# EAGLE board con_brd (EAGLE 9.6.2)
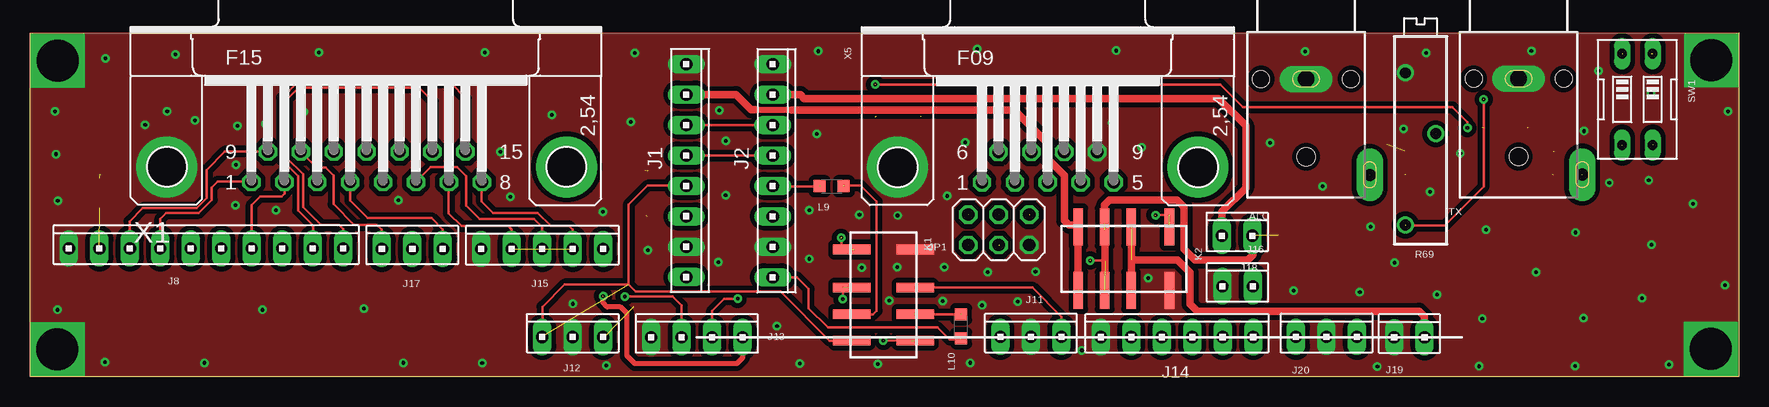
[diagram p0: board, top side]
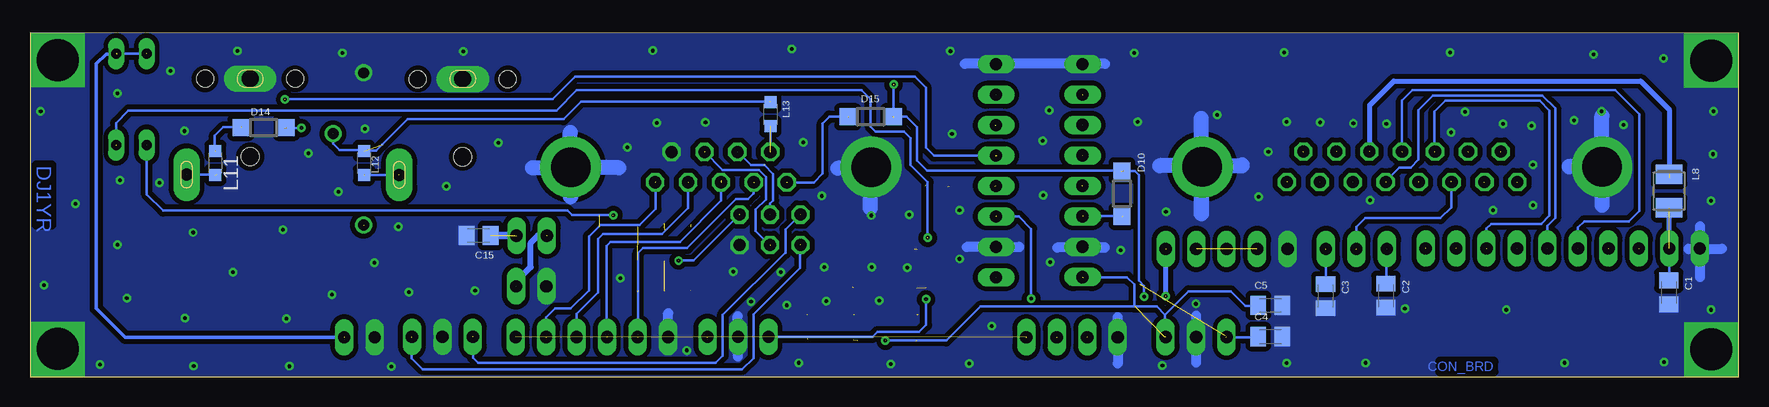
[diagram p1: board, bottom side, seen from below]

Size 142.44 x 28.73 mm. Coordinates in mm from the lower left corner, seen from the top.
Outline: 0,0 0,28.67 142.44,28.73 142.43,0.04 0,0
Copper layers (1*16): Top 0.035mm / dielectric 1.5mm / Bottom 0.035mm
Design rules "default *": minimum track width 6mil, minimum drill 0.35mm, track to track 6mil, track to pad 6mil, pad to pad 6mil, via to via 6mil, smd to smd 6mil, copper to edge 0mil, drill to drill 6mil, minimum pad ring 10mil, minimum via ring 8mil, stop-mask expansion 4mil, vias tented up to drill 0mil, thermal gap 10mil

## Footprints (pad centres in the part's own frame; a part is rotated, then mirrored left to right if it is on the bottom)
WBTOR1 = drill 1.4 pad 2.2 long: S 0,-4 | drill 1 pad 2.2 long: T 5.3,-12 | hole 1.4: -3.75,-4; 3.75,-4 | hole 1.5: 0,-10.5
C0805K = smd 1.3 x 1.6: 1 -1,0; 2 1,0
SOD123 = smd 1.4 x 1.4: A 1.9,0; C -1.9,0
10X08MTA = drill 1.016 long: 1 8.89,0; 2 6.35,0; 3 3.81,0; 4 1.27,0; 5 -1.27,0; 6 -3.81,0; 7 -6.35,0; 8 -8.89,0
10X10MTA = drill 1.016 long: 1 11.43,0; 2 8.89,0; 3 6.35,0; 4 3.81,0; 5 1.27,0; 6 -1.27,0; 7 -3.81,0; 8 -6.35,0; 9 -8.89,0; 10 -11.43,0
10X03MTA = drill 1.016 long: 1 2.54,0; 2 0,0; 3 -2.54,0
10X04MTA = drill 1.016 long: 1 3.81,0; 2 1.27,0; 3 -1.27,0; 4 -3.81,0
10X06MTA = drill 1.016 long: 1 6.35,0; 2 3.81,0; 3 1.27,0; 4 -1.27,0; 5 -3.81,0; 6 -6.35,0
10X05MTA = drill 1.016 long: 1 5.08,0; 2 2.54,0; 3 0,0; 4 -2.54,0; 5 -5.08,0
10X02MTA = drill 1.016 long: 1 1.27,0; 2 -1.27,0
2X03 = drill 1.016 octagon: 1 -2.54,-1.27; 2 -2.54,1.27; 3 0,-1.27; 4 0,1.27; 5 2.54,-1.27; 6 2.54,1.27
GN-A = smd 0.8 x 3.1: 1 -3.835,-2.65; 2 -0.635,-2.65; 3 1.565,-2.65; 4 3.765,-2.65; 5 3.765,2.65; 6 1.565,2.65; 7 -0.635,2.65; 8 -3.835,2.65
L3230M = smd 1.6 x 2.2: 1 -1.4,0; 2 1.4,0
L2012C = smd 1 x 1: 1 -1,0; 2 1,0
RTRIM43P = drill 0.9: 1 -7.62,1.27; 2 0,-1.27; 3 5.08,1.27
EDG-02 = drill 0.813 long: 1 -1.27,-3.81; 2 1.27,-3.81; 3 1.27,3.81; 4 -1.27,3.81
F15HP = drill 1.016 octagon: 1 -9.601,-1.27; 2 -6.858,-1.27; 3 -4.115,-1.27; 4 -1.372,-1.27; 5 1.372,-1.27; 6 4.115,-1.27; 7 6.858,-1.27; 8 9.601,-1.27; 9 -8.23,1.27; 10 -5.486,1.27; 11 -2.743,1.27; 12 0,1.27; 13 2.743,1.27; 14 5.486,1.27; 15 8.23,1.27 | drill 3.302 pad 5.08: G1 -16.662,0; G2 16.662,0
F09HP = drill 1.016 octagon: 1 -5.486,-1.27; 2 -2.743,-1.27; 3 0,-1.27; 4 2.743,-1.27; 5 5.486,-1.27; 6 -4.115,1.27; 7 -1.372,1.27; 8 1.372,1.27; 9 4.115,1.27 | drill 3.302 pad 5.08: G1 -12.522,0; G2 12.522,0

## Placement (x,y rotation side)
ALC  WBTOR1  [WBTOR1]  106.37,28.87 0 top
C1  [C0805K]  5.83,7.06 270 bottom
C2  [C0805K]  29.41,6.79 270 bottom
C3  [C0805K]  34.44,6.75 270 bottom
C4  [C0805K]  39.05,3.36 0 bottom
C5  [C0805K]  39.06,5.98 0 bottom
C15  [C0805K]  105.04,11.81 180 bottom
D10  [SOD123]  51.43,15.3 90 bottom
D14  [SOD123]  122.96,20.81 0 bottom
D15  [SOD123]  72.37,21.72 0 bottom
J1  [10X08MTA]  54.7,17.22 270 top
J2  [10X08MTA]  61.91,17.2 270 top
J8  [10X10MTA]  14.68,10.72 0 top
J11  [10X03MTA]  83.43,3.34 0 top
J12  [10X03MTA]  45.24,3.33 0 top
J13  [10X04MTA]  55.59,3.32 0 top
J14  [10X06MTA]  95.61,3.33 0 top
J15  [10X05MTA]  42.69,10.68 0 top
J16  [10X02MTA]  100.66,7.57 0 top
J17  [10X03MTA]  31.87,10.69 0 top
J18  [10X02MTA]  100.63,11.78 0 top
J19  [10X02MTA]  114.98,3.3 0 top
J20  [10X03MTA]  108.07,3.34 0 top
JP1  [2X03]  80.76,12.28 180 top
K1  GN200A1H  [GN-A]  71.14,6.81 270 top
K2  GN200A1H  [GN-A]  91.15,9.86 180 top
L8  [L3230M]  5.8,15.52 270 bottom
L9  [L2012C]  66.82,15.92 0 top
L10  [L2012C]  77.61,4.24 90 top
L11  [L2012C]  126.99,17.87 270 bottom
L12  [L2012C]  114.6,17.85 270 bottom
L13  [L2012C]  80.72,21.92 270 bottom
R69  [RTRIM43P]  115.91,20.3 90 top
SW1  [EDG-02]  133.99,23.16 180 top
TX  WBTOR1  [WBTOR1]  124.09,28.89 0 top
X1  [F15HP]  28.06,17.53 0 top
X5  [F09HP]  84.84,17.51 0 top

## Library data of the parts
ALC TX = con-lumberg; MPN: WBTOR 1 BLACK; OC_FARNELL: 1200146; OC_NEWARK: 98K2588
C1-C5 C15 = rcl; SPICEPREFIX: C
D10 D14 D15 = diode
J1 J2 J8 J11-J20 = con-amp
JP1 = pinhead
K1 K2 = relay; OC_FARNELL: unknown; OC_NEWARK: unknown
L8-L13 = rcl; SPICEPREFIX: L
R69 = rcl; SPICEMODEL: X; SPICEPREFIXL: POT
SW1 = special
X1 X5 = con-subd; OC_FARNELL: unknown; OC_NEWARK: unknown

## Nets
8V: J1.1 J12.1 K1.5
8V_BND_REF: K1.6 L10.2
12V: J13.1 J14.1 J15.1
12V_EXT: J19.1 K2.2 K2.7 SW1.1 SW1.2
A: J14.5 X5.2
ACC: J1.7 K2.4 K2.5
ACC_OUT: J2.7 J16.1 J18.2
ALC: J1.5 J2.5 R69.1
B: J14.4 X5.3
BAND: J1.4 J12.3 K1.4
BAND_MCU: J11.3 K1.2
BAND_MCU_OUT: K1.3 L9.2
BAND_REF_MCU: J11.1 K1.7
C: J14.3 X5.4
D: J14.2 X5.5
EXT_ALC: L12.1 L13.1 R69.2
GND: ALC.S C1.2 C2.2 C3.2 C4.2 C5.2 C15.2 J1.2 J1.8 J2.2 J2.8 J8.10 J11.2 J12.2 J13.4 J14.6 J15.5 J16.2 J19.2 J20.2 JP1.2 K1.8 K2.8 R69.3 TX.S X1.G1 X5.9 X5.G1
N$71: J1.6 J2.6
N$72: J2.4 L9.1
N$75: J2.1 L10.1
N$76: L11.2 TX.T
N$77: ALC.T L12.2
N$79: D10.C J1.3
N$81: D14.C L11.1
N$82: D15.C X5.1
N$84: L13.2 X5.6
N$95: J20.3 JP1.5
N$96: J8.9 L8.2
N$101: K2.1 SW1.3
N$106: K1.1 SW1.4
N$111: J20.1 JP1.6
REM_13,8V: L8.1 X1.13
REM_B: J15.2 X1.6
REM_C: J15.3 X1.7
REM_D: J15.4 X1.8
REM_LIN: J8.1 X1.14
REM_M1: J17.1 X1.4
REM_M2: J17.3 X1.10
REM_ME: J17.2 X1.3
REM_MS1: J8.5 X1.5
REM_MS2: J8.4 X1.2
REM_PROL: J8.7 X1.1
REM_REMO: J8.3 X1.11
REM_RXD: JP1.4 X5.8
REM_TUN: J8.2 X1.15
REM_TXD: JP1.3 X5.7
REM_TXL: J8.8 X1.9
REM_WAIT: J8.6 X1.12
SEND: D10.A D14.A D15.A J13.3
TX_OUT: J2.3 J13.2
VCC: C15.1 J18.1 JP1.1 K2.3 K2.6

## Tracks (layer width: path | path; a pad name or v marks a point on that pad's centre or on a via)
8V  (via drill 0.3)  (5 unrouted)
  Top 0.203: v71.14,3.04 73.47,3.04
  Bottom 0.203: 54.64,8.31 50.99,8.31 50.4,7.72 50.4,5.88 48.52,5.88 47.84,5.2 47.84,3.32 | 50.36,5.89 63.21,5.89 66.06,3.04 v71.14,3.04
8V_BND_REF  (2 unrouted)
  Top 0.203: 73.72,5.22 77.65,5.22
12V  (via drill 0.3)  (5 unrouted)
  Top 0.406: 59.4,3.3 59.4,1.61 58.91,1.12 50.43,1.12 49.76,1.79 49.76,5.31 49.23,5.85 48.12,5.85 47.76,6.21 47.76,6.75
  Bottom 0.406: 47.77,6.73 47.77,10.6 47.8,10.62
  other vias: 47.77,6.76
12V_EXT  (8 unrouted)
  Top 0.61: 91.8,7.1 91.8,12.24 91.79,12.25 | 91.83,9.77 95.64,9.77 96.7,8.72 96.7,6.08 97.3,5.48 115.79,5.48 116.23,5.04 116.23,3.33 116.22,3.31
  Bottom 0.203: 135.19,26.97 132.76,26.97
  Bottom 0.305: J19.1 134.49,3.3 136.92,5.74 136.92,26.13 136.11,26.95 135.18,26.95
A  (2 unrouted)
  Bottom 0.203: 91.74,3.33 91.74,10.36 91.33,10.77 87.67,10.77 83.59,14.84 82.57,14.84 82.12,15.3 82.12,16.25
ACC  (4 unrouted)
  Top 0.508: 60.45,22.29 63.49,22.29 63.5,22.28
  Top 0.61: K2.5 87.37,12.66 | J1.7 58.84,23.56 60.11,22.29 60.45,22.29 | 63.5,22.28 82.06,22.28 84.84,19.49 84.84,18.19 86.23,16.8 86.23,13.04 86.61,12.67 87.33,12.67 87.34,12.67
ACC_OUT  (4 unrouted)
  Top 0.61: J2.7 64.21,23.56 64.52,23.24 99.07,23.24 101.34,20.97 101.34,15.77 99.37,13.8 99.37,11.83 99.38,11.82
  Bottom 0.508: 101.9,7.55 101.9,7.97 100.7,9.17 100.7,11.2 100.09,11.82 99.36,11.82
ALC  (via drill 0.3)  (6 unrouted)
  Top 0.203: J1.5 61.87,18.48 61.92,18.43 | 114.64,12.64 117.92,12.64 121.18,15.9 v121.18,23.15
  Bottom 0.203: 61.83,18.46 67.08,18.46 67.75,19.13 67.75,24.14 68.68,25.06 96.98,25.06 98.88,23.16 121.17,23.16 v121.17,23.16
B  (2 unrouted)
  Bottom 0.203: 94.38,3.31 94.38,10.94 94.04,11.28 88.26,11.28 84.84,14.71 84.84,16.39
BAND  (4 unrouted)
  Top 0.203: 42.77,3.41 J12.3 | 54.72,15.96 51.49,15.96 49.9,14.38 49.9,7.71 44.57,7.71 42.71,5.86 42.71,3.31 | 49.9,7.72 50.47,7.14 62.55,7.14 66.66,3.04 68.56,3.04 68.58,3.02
BAND_MCU  (via drill 0.3)  (4 unrouted)
  Top 0.203: v67.76,6.49 67.76,7.47
  Bottom 0.203: 80.87,3.33 72.23,3.33 71.81,3.75 68.33,3.75 67.75,4.33 67.75,6.47 67.76,6.48 67.77,6.48
BAND_MCU_OUT  (2 unrouted)
  Top 0.203: 68.4,5.24 70.27,5.24 70.57,5.54 70.57,14.63 69.25,15.95 67.87,15.95 67.81,16.01
BAND_REF_MCU  (2 unrouted)
  Top 0.203: 73.86,7.46 83.54,7.46 85.97,5.03 85.97,3.32
C  (2 unrouted)
  Bottom 0.203: 96.89,3.35 96.89,5.27 95.09,7.07 95.09,11.52 94.68,11.93 89.75,11.93 87.59,14.08 87.59,16.27
D  (2 unrouted)
  Bottom 0.203: J14.2 99.41,4.99 98.69,5.71 97.37,5.71 95.85,7.24 95.85,11.74 94.9,12.69 91.62,12.69 90.29,14.01 90.29,16.29
EXT_ALC  (3 unrouted)
  Bottom 0.203: R69.2 117.18,19.47 116.63,18.92 114.6,18.92 114.56,18.88 113.58,18.88 113.09,19.38 | 80.75,22.95 96.51,22.95 97.96,21.5 110.96,21.5 113.09,19.38 | 113.09,19.38
GND  (via drill 0.3, 3.5)
  Bottom 0.813: 52.81,26.12 64.54,26.12 64.54,26.11 | 54.72,10.85 54.72,10.83 52.84,10.83 52.84,10.8 56.82,10.8 | 64.37,10.85 61.89,10.85 59.98,10.85 59.98,10.87 | 45.25,5.11 45.25,1.19 45.23,1.19 | 51.76,4.98 51.76,3.28 51.76,1.11 51.77,1.11 | 83.44,1.69 83.44,3.27 83.44,5.1 83.45,5.1 | 3.23,10.69 3.23,12.6 | 3.23,8.33 3.23,10.69 | 3.23,10.69 1.41,10.69 | 3.23,10.69 4.21,10.69 4.21,10.66 | 89.25,3.35 89.25,5.34 89.24,5.34
  Bottom 1.27: 11.4,17.56 11.4,21.77 | 11.4,17.56 11.4,14.32 | 11.4,17.56 14.14,17.56 14.14,17.53 | 44.84,21.58 44.84,13.63 44.77,13.63 44.77,17.62 | 44.77,17.62 48.26,17.62 | 44.77,17.62 41.41,17.62 41.41,17.69 | 72.39,14.07 72.39,17.43 75.09,17.43 | 100.56,17.46 97.4,17.46 | 93.37,17.46 97.4,17.46 | 97.4,17.46 97.4,20.41 | 97.4,17.46 97.4,15.03 97.36,15.03
  other vias: 2.31,26.4 140.14,26.44 140.12,2.33 2.29,2.31 9.6,21.03 11.43,22.15 13.75,21.42 17.28,20.94 19.64,21.13 23.99,20.43 22.82,22.13 29.38,21.11 32.13,21.17 34.91,21.24 37.7,21.3 30.72,14.75 20.49,13.91 17.14,14.32 17.17,17.72 40.03,15.03 39.21,18.8 43.48,21.86 47.75,13.79 2.32,14.7 2.16,18.6 2.1,22.15 6.29,26.59 12.11,26.92 24.07,27.08 37.91,27.08 50.41,27.02 65.71,27.19 65.58,20.28 58.01,19.72 57.47,22.23 50.09,21.3 51.51,10.59 57.98,15.17 57.39,9.58 64.96,9.85 64.96,13.91 69.14,13.55 69.32,9.14 72.29,9.15 72.31,13.47 82.34,6.28 79.84,8.75 83.81,8.8 87.68,2.22 78.36,1.18 79.36,5.98 76.07,6.34 71.64,6.35 70.68,1.09 64.16,1.12 62.27,4.23 48.05,0.95 45.25,6.1 37.69,1.16 31.12,1.18 27.83,5.71 19.38,5.6 14.53,1.18 6.24,1.24 2.31,5.6 76.23,9.15 76.46,15.1 77.97,19.58 86.13,21.24 90.2,21.21 92.66,19.18 103.39,19.54 107.74,15.91 93.22,8.24 105.34,7.21 110.85,7.08 117.28,6.85 121.06,4.87 129.51,4.91 134.38,6.59 135.16,11.05 134.94,16.4 128.84,12.06 121.36,12.28 111.75,12.55 116.72,15.47 119.23,18.65 114.52,20.71 129.55,20.52 131.65,16.21 135.14,23.67 130.74,25.55 125.15,27.19 116.38,27.03 106.31,27.17 90.53,27.23 78.96,27.37 125.53,8.74 113.74,9.52 112.31,0.87 120.8,0.89 128.8,0.92 136.61,1.02 141.29,7.65 138.64,14.44 141.55,22.16
  pour Top (isolate 0.406, no thermals): 0.03,28.71 142.41,28.71 142.41,0.04 0.02,0.04 0.02,28.65
  pour Bottom (isolate 0.406, no thermals): 142.42,28.68 142.42,0.02 0,0.02 0,28.67 0.01,28.67
N$1
  Bottom 0.61: 101.96,11.79 104.06,11.79 104.06,11.78
N$2
  Bottom 0.406: 5.78,10.67 5.78,14.11 5.79,14.12
N$3
  Bottom 0.203: 80.76,18.79 80.7,18.84 80.7,21.02
N$4  (via drill 0.3)
  other vias: 93.83,13.51
N$71  (2 unrouted)
  Top 0.203: 54.69,21 62.01,21
N$72  (2 unrouted)
  Top 0.203: 62.01,15.91 62.03,15.89 65.9,15.89
N$75  (2 unrouted)
  Top 0.203: 61.93,8.3 63.95,8.3 64.91,7.33 64.91,5.72 66.5,4.13 75.65,4.13 76.66,3.13 77.58,3.13
N$76  (2 unrouted)
  Bottom 0.203: 129.37,16.88 126.9,16.88 126.88,16.9
N$77  (2 unrouted)
  Bottom 0.203: 111.71,16.85 L12.2 114.63,16.88
N$79  (2 unrouted)
  Bottom 0.203: 54.67,13.41 51.35,13.41 51.34,13.42
N$81  (2 unrouted)
  Bottom 0.203: 127.03,18.82 127.03,20.15 126.33,20.85 124.82,20.85
N$82  (2 unrouted)
  Bottom 0.203: 79.31,16.24 77.09,16.24 76.36,16.97 76.36,21.16 75.8,21.73 74.22,21.73
N$84  (1 unrouted)
N$95  (2 unrouted)
  Bottom 0.203: 78.23,13.55 79.47,12.31 79.47,10.39 | 79.47,10.39 79.47,10.34 | 79.47,10.39 84.69,5.16 84.69,1.78 85.3,1.17 105.07,1.17 105.51,1.61 105.51,3.35 105.52,3.36
N$96  (1 unrouted)
N$101  (3 unrouted)
  Top 0.203: 93.83,13.48 93.83,13.5 94.95,13.5 94.96,13.51
  Bottom 0.203: 93.83,13.51 97.24,13.51 97.61,13.88 131.35,13.88 132.7,15.24 132.7,19.32 132.69,19.33
N$106  (via drill 0.3)  (4 unrouted)
  Top 0.203: 67.63,11.63 67.63,10.63 67.64,10.65 68.72,10.65
  Bottom 0.203: 67.62,11.58 67.62,16.25 69.05,17.68 69.05,19.93 69.58,20.46 71.96,20.46 72.37,20.87 72.37,23.17 73.13,23.93 96.86,23.93 98.57,22.23 134.24,22.23 135.27,21.2 135.27,19.39 135.29,19.37
  other vias: 67.61,11.61
N$111  (2 unrouted)
  Bottom 0.203: 78.25,11 78.25,9.11 82.14,5.21 82.14,1.57 83.07,0.65 109.69,0.65 110.62,1.57 110.62,3.32
REM_13,8V  (2 unrouted)
  Bottom 0.406: 30.77,18.8 30.77,22.69 28.76,24.7 8.17,24.7 5.8,22.32 5.8,16.61 5.78,16.59
REM_B  (2 unrouted)
  Top 0.203: 32.16,16.28 33.39,17.51 35.6,17.51 36.35,16.77 36.35,14.29 37.46,13.17 42.01,13.17 42.68,12.5 42.68,10.66
REM_C  (2 unrouted)
  Top 0.203: 34.91,16.27 34.91,13.66 35.98,12.58 39.88,12.58 40.16,12.31 40.16,10.66
REM_D  (2 unrouted)
  Top 0.203: 37.66,16.3 37.66,14.66 38.62,13.7 42.32,13.7 43.42,12.6 44.93,12.6 45.23,12.3 45.23,10.68
REM_LIN  (2 unrouted)
  Top 0.203: 33.57,18.84 33.57,23 32.42,24.14 22.41,24.14 21.41,23.14 21.41,18.28 22.78,16.91 22.78,14.17 24.28,12.67 25.79,12.67 26.11,12.34 J8.1
REM_M1  (2 unrouted)
  Top 0.203: 26.7,16.29 26.7,14.72 28.16,13.26 33.47,13.26 34.41,12.32 34.41,10.63 34.42,10.62
REM_M2  (2 unrouted)
  Top 0.203: 22.6,18.77 23.9,17.47 24.65,17.47 25.29,16.83 25.29,14.41 27.01,12.7 28.91,12.7 29.32,12.29 J17.3
REM_ME  (2 unrouted)
  Bottom 0.203: 23.97,16.36 23.97,14.15 24.86,13.26 31.11,13.26 31.87,12.5 31.87,10.64
REM_MS1  (2 unrouted)
  Bottom 0.203: 29.47,16.3 28.29,17.48 27.35,17.48 26.71,18.13 26.71,22.26 25.49,23.48 16.36,23.48 15.31,22.43 15.31,13.26 15.98,12.59 15.98,10.73
REM_MS2  (2 unrouted)
  Top 0.203: J8.4 18.5,14.36 19.19,15.05 20.98,15.05 21.24,15.32 21.24,16.25
REM_PROL  (2 unrouted)
  Top 0.203: 10.86,10.71 10.86,13.19 11.36,13.69 14.07,13.69 15.15,14.77 15.15,15.8 15.64,16.29 18.48,16.29 18.49,16.28
REM_REMO  (2 unrouted)
  Bottom 0.203: 25.36,18.81 25.36,22.16 24.48,23.04 16.59,23.04 15.8,22.24 15.8,13.46 16.48,12.78 20.64,12.78 21.03,12.39 21.03,10.7
REM_RXD  (3 unrouted)
  Bottom 0.203: 86.23,18.8 84.71,17.28 81.71,17.28 | 81.71,17.28 81.66,17.28 81.08,16.7 81.08,14.82 81.94,13.96 81.94,12.18 80.75,10.99
REM_TUN  (2 unrouted)
  Top 0.203: 36.33,18.82 36.33,23.25 35.04,24.54 22.28,24.54 21.01,23.27 21.01,18.1 22.35,16.76 22.35,13.91 23.6,12.66 23.6,10.75 23.58,10.73
REM_TXD  (3 unrouted)
  Bottom 0.203: JP1.3 80.75,14.46 80.48,14.73 80.48,16.94 81.23,17.68 | 83.46,18.79 82.35,17.68 81.23,17.68
REM_TXL  (2 unrouted)
  Top 0.203: 19.86,18.8 16.25,18.8 14.73,17.29 14.73,14.92 13.89,14.08 9.41,14.08 8.3,12.98 8.3,10.71
REM_WAIT  (3 unrouted)
  Bottom 0.203: 27.2,23.93 10.29,23.93 8.3,21.95 8.3,13.86 9.18,12.99 12.89,12.99 13.42,12.46 13.42,10.74 | 28.08,18.8 28.08,23.05 27.2,23.93
S$2
  Bottom 0.203: 5.8,8.11 5.81,8.11 5.81,10.76
S$3
  Bottom 0.203: 29.36,7.73 29.36,10.66 29.35,10.66
S$4
  Bottom 0.203: 34.41,7.68 34.41,10.58
S$5
  Bottom 0.203: 42.7,3.3 40.12,3.3 40.12,3.31
S$6
  Bottom 0.203: 40.07,5.95 41.14,5.95 42.34,7.15 45.87,7.15 47.84,5.18
SEND  (via drill 0.3)  (10 unrouted)
  Top 0.203: v49.58,6.71 53.57,6.71 54.33,5.96 54.33,3.3 | 70.42,24.4 70.43,24.4 99.21,24.4 101.1,22.51 118.57,22.51 119.8,21.29 119.8,20.77
  Bottom 0.203: 51.51,17.19 50.35,17.19 50.01,16.86 50.01,8.04 49.58,7.61 v49.58,6.71 | 51.27,17.21 67.65,17.21 68.49,18.04 68.49,20.86 69.36,21.74 70.53,21.74 70.55,21.71 | 119.8,20.77 121.22,20.77 | 70.46,21.7 70.46,24.42
  other vias: 119.82,20.77 70.46,24.4
TX_OUT  (via drill 0.3)  (2 unrouted)
  Top 0.203: 56.86,3.29 56.86,5.52 57.86,6.52 v58.99,6.52
  Bottom 0.203: v58.99,6.52 58.99,12.37 60.02,13.4 61.89,13.4
VCC  (via drill 0.3)  (8 unrouted)
  Top 0.203: 88.37,9.71 89.58,9.71 89.59,9.69
  Top 0.61: 89.55,7.2 89.57,7.18 89.59,7.18 89.59,12.79 89.58,12.8 | 89.56,12.28 89.56,14.35 89.99,14.77 95.62,14.77 96.19,14.2 96.19,10.69 97.12,9.76 101.53,9.76 101.96,10.19 101.96,11.77 101.99,11.8
  Bottom 0.203: v88.38,9.72 87.11,9.72 83.32,13.51

## Text on the board
Bottom: DJ1YR | CON_BRD